# EAGLE board SeeedMega_bare (EAGLE 6.1)
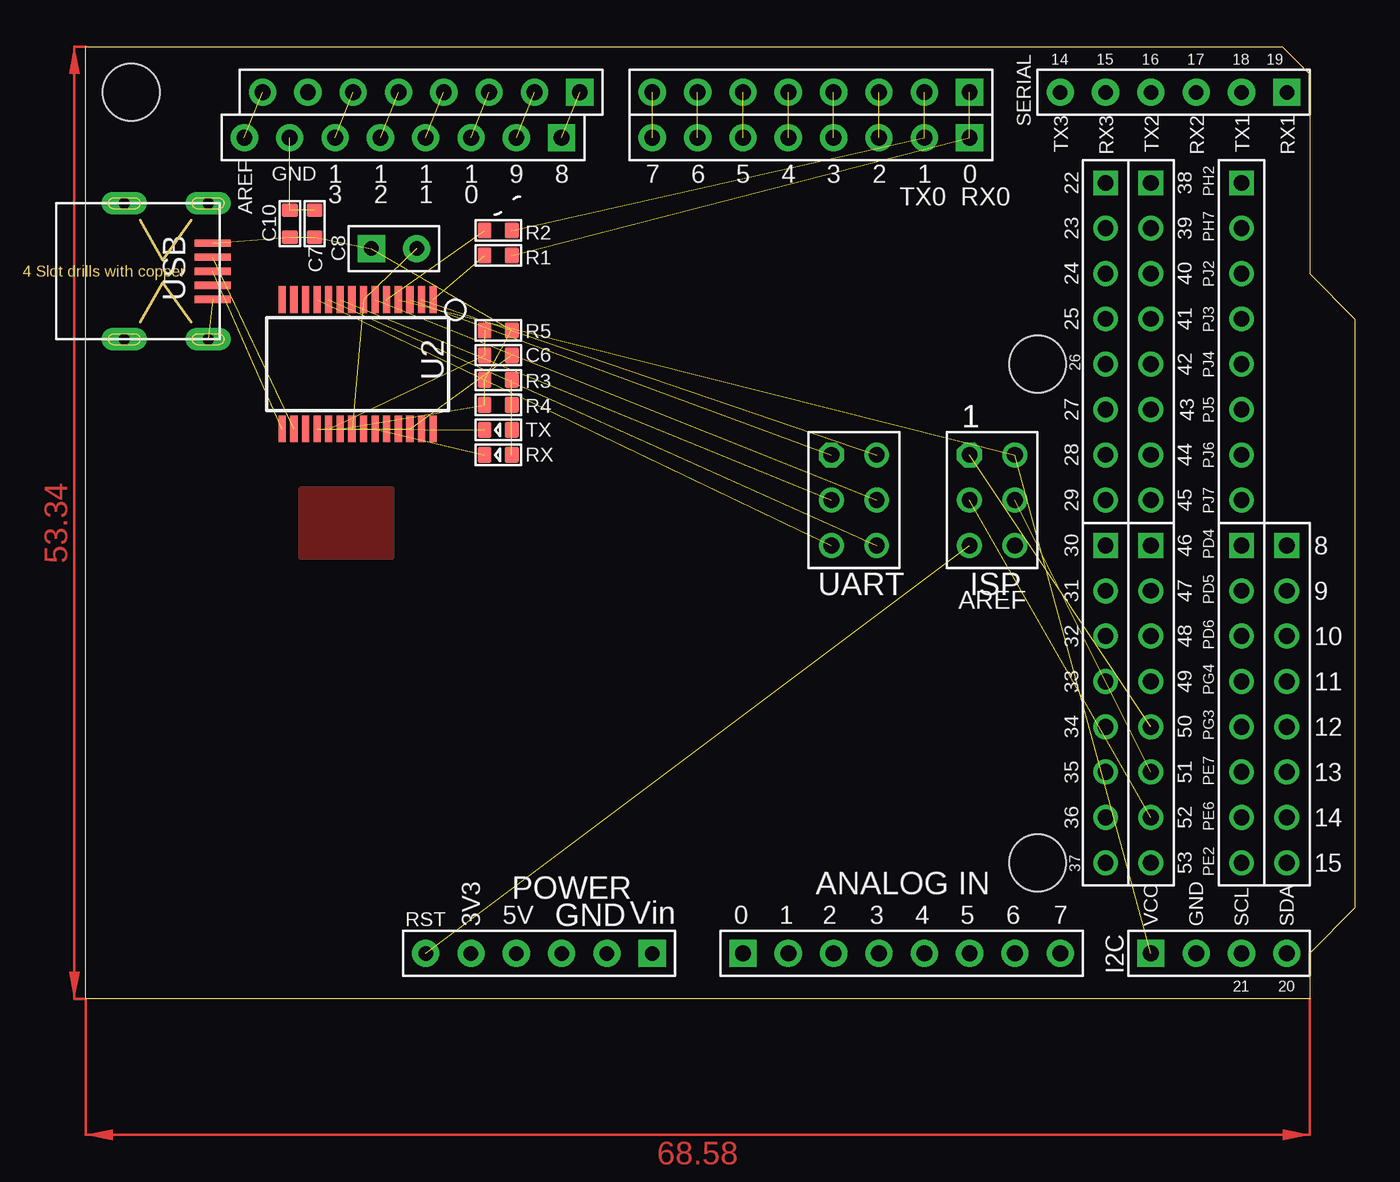
[diagram p0: board, top side]
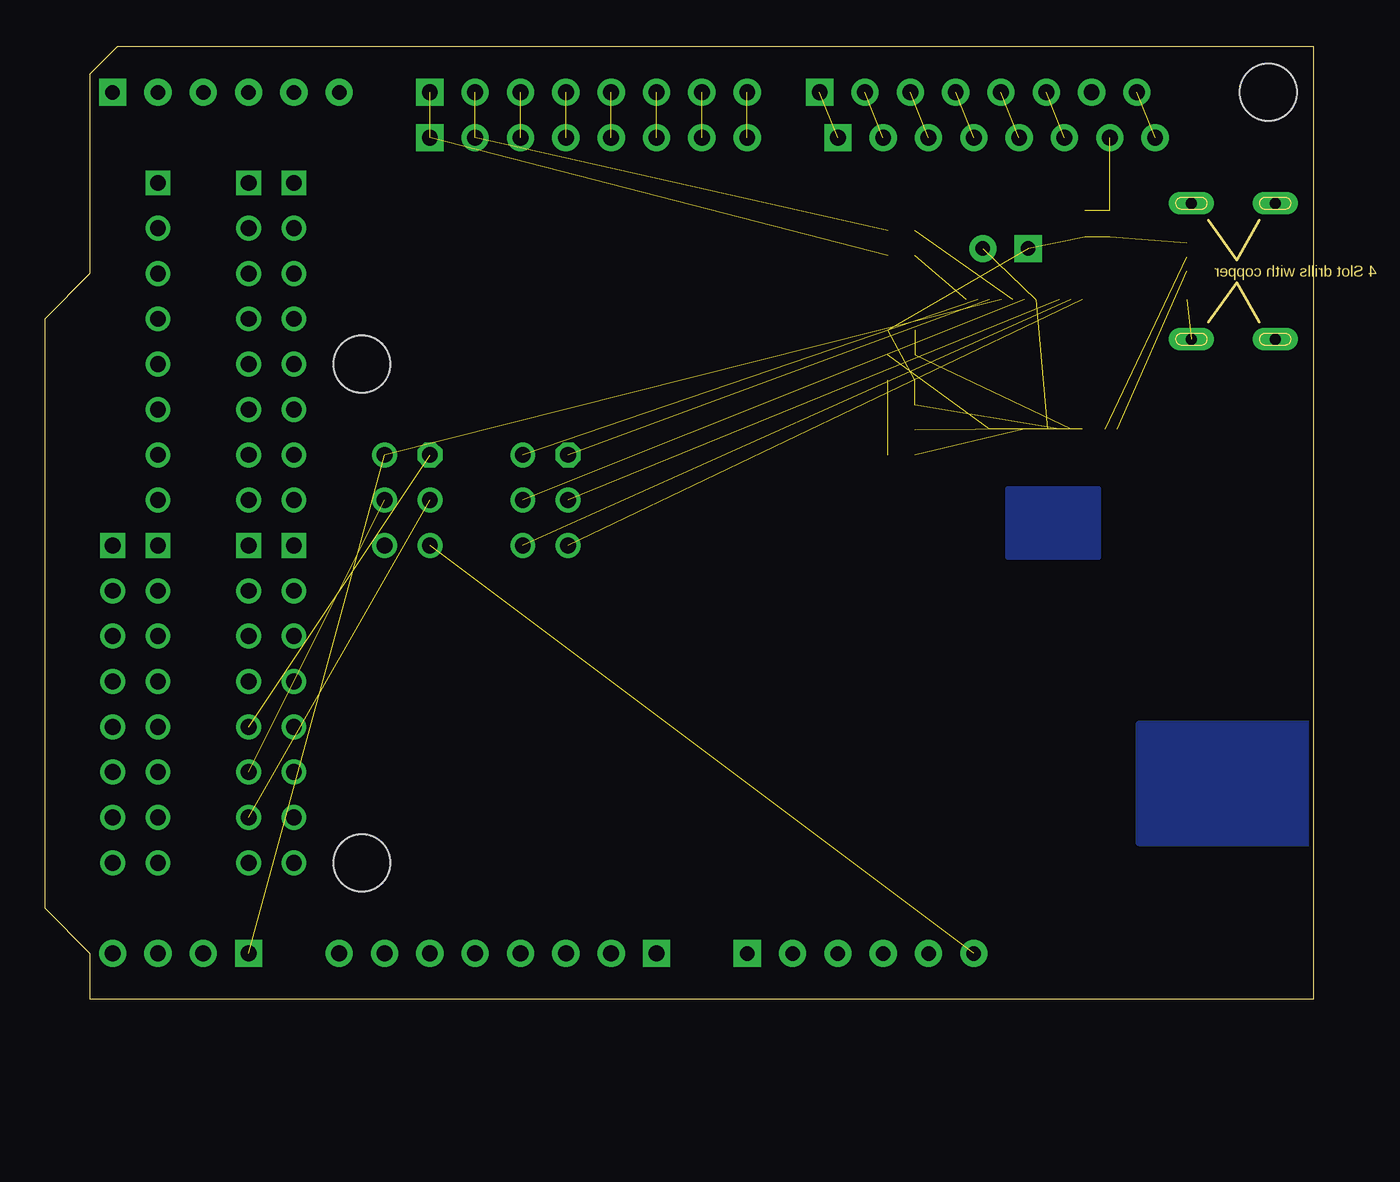
[diagram p1: board, bottom side, seen from below]

Size 71.12 x 53.34 mm. Coordinates in mm from the lower left corner, seen from the top.
Outline: 68.58,40.64 71.12,38.1 71.12,5.08 68.58,2.54 68.58,0 0,0 0,53.34 67.06,53.34 68.58,51.82 68.58,40.64
Copper layers (1*16): Top 0.035mm / dielectric 1.5mm / Bottom 0.035mm
Design rules: minimum track width 8mil, minimum drill 12mil, track to track 6mil, track to pad 6mil, pad to pad 6mil, via to via 8mil, smd to smd 0mil, copper to edge 10mil, drill to drill 10mil, minimum pad ring 10mil, minimum via ring 6mil, stop-mask expansion 2mil, vias tented up to drill 25mil, thermal gap 10mil
Holes 3.2 mm at 2.54,50.8 53.34,7.62 53.34,35.56
tRestrict: area 22.5,30.6 to 23.4,32; area 4.6,49.3 to 8.4,52.3; area 17.5,31.5 to 18.2,32.3; area 15.2,38.9 to 15.9,39.9

## Footprints (pad centres in the part's own frame; a part is rotated, then mirrored left to right if it is on the bottom)
CK_1X8 = drill 0.889 pad 1.524 square: 1 0,8.89 | drill 0.889 pad 1.524: 2 0,6.35; 3 0,3.81; 4 0,1.27; 5 0,-1.27; 6 0,-3.81; 7 0,-6.35; 8 0,-8.89
0603_S = smd 0.762 x 0.889: 1 -0.762,0; 2 0.762,0
PWR_1X2 = drill 0.813 pad 1.524 square: + 1.27,0 | drill 0.813 pad 1.524: - -1.27,0
CK_1X8_THIN = drill 0.889 pad 1.397 square: 1 0,8.89 | drill 0.889 pad 1.397: 2 0,6.35; 3 0,3.81; 4 0,1.27; 5 0,-1.27; 6 0,-3.81; 7 0,-6.35; 8 0,-8.89
CK_1X4 = drill 0.889 pad 1.524 square: 1 0,3.81 | drill 0.889 pad 1.524: 2 0,1.27; 3 0,-1.27; 4 0,-3.81
CK_2X3_THIN = drill 0.889 pad 1.397 octagon: 1 -1.27,2.54 | drill 0.889 pad 1.397: 2 -1.27,0; 3 -1.27,-2.54; 4 1.27,-2.54; 5 1.27,0; 6 1.27,2.54
CK_1X6@1 = drill 0.813 pad 1.524 square: 1 0,6.35 | drill 0.813 pad 1.524: 2 0,3.81; 3 0,1.27; 4 0,-1.27; 5 0,-3.81; 6 0,-6.35
LED0603_S = smd 0.762 x 0.889: 1 -0.762,0; 2 0.762,0
SSOP28 = smd 0.4 x 1.5: 1 -4.225,-3.625; 2 -3.575,-3.625; 3 -2.925,-3.625; 4 -2.275,-3.625; 5 -1.625,-3.625; 6 -0.975,-3.625; 7 -0.325,-3.625; 8 0.325,-3.625; 9 0.975,-3.625; 10 1.625,-3.625; 11 2.275,-3.625; 12 2.925,-3.625; 13 3.575,-3.625; 14 4.225,-3.625; 15 4.225,3.625; 16 3.575,3.625; 17 2.925,3.625; 18 2.275,3.625; 19 1.625,3.625; 20 0.975,3.625; 21 0.325,3.625; 22 -0.325,3.625; 23 -0.975,3.625; 24 -1.625,3.625; 25 -2.275,3.625; 26 -2.925,3.625; 27 -3.575,3.625; 28 -4.225,3.625
MINI_STRONG = smd 2.032 x 0.406: 1 0.381,-1.575; 2 0.381,-0.787; 3 0.381,0; 4 0.381,0.787; 5 0.381,1.575 | drill 0.635 pad 1.27 long: GND@1 0.635,3.81; GND@2 5.334,3.81; GND@3 5.334,-3.81; GND@4 0.635,-3.81

## Placement (x,y rotation side)
0~1  CK_1X8DD  [CK_1X8]  40.64,48.26 270 top
0~2  CK_1X8DD  [CK_1X8]  45.72,2.54 90 top
0~7  CK_1X8DD  [CK_1X8]  40.64,50.8 270 top
8~1  CK_1X8DD  [CK_1X8]  17.78,48.26 270 top
8~13  CK_1X8DD  [CK_1X8]  18.8,50.8 270 top
C6  100n  [0603_S]  23.11,36.07 180 top
C7  100n  [0603_S]  12.83,43.43 90 top
C8  PWR2P_2.54_180  [PWR_1X2]  17.27,42.04 180 top
C10  10n  [0603_S]  11.43,43.43 270 top
D22~  CK_1X8_THIN  [CK_1X8_THIN]  57.15,36.83 0 top
D30~  CK_1X8_THIN  [CK_1X8_THIN]  57.15,16.51 0 top
D38~  CK_1X8_THIN  [CK_1X8_THIN]  59.69,36.83 0 top
D46~  CK_1X8_THIN  [CK_1X8_THIN]  59.69,16.51 0 top
I2C  CK_1X4  [CK_1X4]  63.5,2.54 90 top
ISP  CK_2X3  [CK_2X3_THIN]  50.8,27.94 0 top
J8  CK_1X8_THIN  [CK_1X8_THIN]  64.77,16.51 0 top
J9  CK_1X8_THIN  [CK_1X8_THIN]  67.31,16.51 0 top
J10  CK_1X8_THIN  [CK_1X8_THIN]  64.77,36.83 0 top
J11  [CK_1X6@1]  25.4,2.54 270 top
R1  1k  [0603_S]  23.11,41.66 0 top
R2  1k  [0603_S]  23.11,43.05 0 top
R3  1k  [0603_S]  23.11,34.67 180 top
R4  1k  [0603_S]  23.11,33.27 180 top
R5  10k  [0603_S]  23.11,37.47 180 top
RX  LED0603  [LED0603_S]  23.11,30.48 180 top
SERIAL  [CK_1X6@1]  60.96,50.8 270 top
TX  LED0603  [LED0603_S]  23.11,31.88 180 top
U2  FT232RL  [SSOP28]  15.24,35.56 180 top
UART  CK_2X3  [CK_2X3_THIN]  43.05,27.94 0 top
USB  [MINI_STRONG]  7.49,40.77 180 top

## Library data of the parts
0~1 0~2 0~7 8~1 8~13 C8 D22~ D30~ D38~ D46~ I2C ISP J8-J11 SERIAL UART = CONNECTER
C6 C7 C10 R1-R5 RX TX = CPT_SMD
U2 = ICs_v54
USB = Connector

## Nets
ADC8: J9.1
ADC9: J9.2
ADC10: J9.3
ADC11: J9.4
ADC12: J9.5
ADC13: J9.6
ADC14: J9.7
ADC15: J9.8
AREF: 8~1.8 8~13.8
CTS: U2.11 UART.3
D+: U2.15 USB.3
D-: U2.16 USB.2
DCD: U2.10 UART.4
DSR: U2.9 UART.2
DTR: U2.2 UART.6
FT_RST: C6.2 R5.2 U2.19
FT_RX: R2.1 U2.5
FT_TX: R1.1 U2.1
GND: 8~1.7 8~13.7 C6.1 C7.2 C8.- C10.1 I2C.2 ISP.4 J11.2 J11.3 U2.7 U2.18 U2.21 U2.25 U2.26 USB.5 USB.GND@1 USB.GND@2 USB.GND@3 USB.GND@4
LED_RX: RX.2 U2.23
LED_TX: TX.2 U2.22
N$6: U2.17
N$31: R3.1 RX.1
N$32: R4.1 TX.1
PA0/D22: D22~.1
PA1/D23: D22~.2
PA2/D24: D22~.3
PA3/D25: D22~.4
PA4/D26: D22~.5
PA5/D27: D22~.6
PA6/D28: D22~.7
PA7/D29: D22~.8
PB0/D53: D46~.8
PB1/SCK/D52: D46~.7 ISP.2
PB2/MOSI/D51: D46~.6 ISP.5
PB3/MISO/D50: D46~.5 ISP.1
PB4/D10: 8~1.3 8~13.3
PB5/D11: 8~1.4 8~13.4
PB6/D12: 8~1.5 8~13.5
PB7/D13: 8~1.6 8~13.6
PC0/D37: D30~.8
PC1/D36: D30~.7
PC2/D35: D30~.6
PC3/D34: D30~.5
PC4/D33: D30~.4
PC5/D32: D30~.3
PC6/D31: D30~.2
PC7/D30: D30~.1
PD0/SCL: I2C.3
PD1/SDA: I2C.4
PD2/RX1: SERIAL.1
PD3/TX1: SERIAL.2
PD4: J8.1
PD5: J8.2
PD6: J8.3
PD7/D38: D38~.1
PE0/RX0/D0: 0~1.1 0~7.1 R1.2
PE1/TX0/D1: 0~1.2 0~7.2 R2.2
PE2: J8.8
PE3/D5: 0~1.6 0~7.6
PE4/D2: 0~1.3 0~7.3
PE5/D3: 0~1.4 0~7.4
PE6: J8.7
PE7: J8.6
PF0/D54: 0~2.1
PF1/D55: 0~2.2
PF2/D56: 0~2.3
PF3/D57: 0~2.4
PF4/D58: 0~2.5
PF5/D59: 0~2.6
PF6/D60: 0~2.7
PF7/D61: 0~2.8
PG0/D41: D38~.4
PG1/D40: D38~.3
PG2/D39: D38~.2
PG3: J8.5
PG4: J8.4
PG5/D4: 0~1.5 0~7.5
PH0/RXD2: SERIAL.3
PH1/TXD2: SERIAL.4
PH2: J10.1
PH3/D6: 0~1.7 0~7.7
PH4/D7: 0~1.8 0~7.8
PH5/D8: 8~1.1 8~13.1
PH6/D9: 8~1.2 8~13.2
PH7: J10.2
PJ0/RXD3: SERIAL.5
PJ1/TXD3: SERIAL.6
PJ2: J10.3
PJ3: J10.4
PJ4: J10.5
PJ5: J10.6
PJ6: J10.7
PJ7: J10.8
PL0/D49: D46~.4
PL1/D48: D46~.3
PL2/D47: D46~.2
PL3/D46: D46~.1
PL4/D45: D38~.8
PL5/D44: D38~.7
PL6/D43: D38~.6
PL7/D42: D38~.5
RESET_1280: ISP.3 J11.6
RI: U2.6 UART.5
RTS: U2.3 UART.1
VCC: I2C.1 ISP.6 U2.4
VDD3V3: J11.5
VDD5_USB: C7.1 C8.+ C10.2 R3.2 R4.2 R5.1 U2.20 USB.1
VDD5V: J11.4
VDD_EXT: J11.1

## Tracks (layer width: path | path; a pad name or v marks a point on that pad's centre or on a via)
AREF  (1 unrouted)
CTS  (1 unrouted)
D+  (1 unrouted)
D-  (1 unrouted)
DCD  (1 unrouted)
DSR  (1 unrouted)
DTR  (1 unrouted)
FT_RST  (2 unrouted)
FT_RX  (1 unrouted)
FT_TX  (1 unrouted)
GND  (9 unrouted)
LED_RX  (1 unrouted)
LED_TX  (1 unrouted)
N$31  (1 unrouted)
N$32  (1 unrouted)
PB1/SCK/D52  (1 unrouted)
PB2/MOSI/D51  (1 unrouted)
PB3/MISO/D50  (1 unrouted)
PB4/D10  (1 unrouted)
PB5/D11  (1 unrouted)
PB6/D12  (1 unrouted)
PB7/D13  (1 unrouted)
PE0/RX0/D0  (2 unrouted)
PE1/TX0/D1  (2 unrouted)
PE3/D5  (1 unrouted)
PE4/D2  (1 unrouted)
PE5/D3  (1 unrouted)
PG5/D4  (1 unrouted)
PH3/D6  (1 unrouted)
PH4/D7  (1 unrouted)
PH5/D8  (1 unrouted)
PH6/D9  (1 unrouted)
RESET_1280  (1 unrouted)
RI  (1 unrouted)
RTS  (1 unrouted)
VCC  (2 unrouted)
VDD3V3
  pour Top (isolate 0.406): 12.06,28.57 17.14,28.57 17.14,24.77 12.06,24.77
  pour Bottom: 12.06,28.57 17.14,28.57 17.14,24.77 12.06,24.77
VDD5
  pour Bottom: 9.78,15.37 0,15.37 0,8.76 9.78,8.76
VDD5_USB  (7 unrouted)
(copper drawn outside any net)
  shapes: Top area x2

## Text on the board
tPlace: 14 | 15 | 16 | 17 | 18 | 19 | TX3 | RX3 | TX2 | RX2 | TX1 | RX1 | AREF | GND | 1 | 1 | 1 | 1 | 9 | 8 | 7 | 6 | 5 | 4 | 3 | 2 | 1 | 0 | 3 | 2 | 1 | 0 | 22 | 38 | PH2 | TX0 | RX0 | 23 | 39 | PH7 | 24 | 40 | PJ2 | 25 | 41 | PJ3 | 26 | 42 | PJ4 | 1 | 27 | 43 | PJ5 | 28 | 44 | PJ6 | 29 | 45 | PJ7 | 30 | 46 | PD4 | 8 | AREF | 31 | 47 | PD5 | 9 | 32 | 48 | PD6 | 10 | 33 | 49 | PG4 | 11 | 34 | 50 | 12 | PG3 | 35 | 51 | PE7 | 13 | 36 | 52 | 14 | PE6 | 37 | 53 | PE2 | 15 | POWER | ANALOG IN | RST | 3V3 | 5V | GND | Vin | 0 | 1 | 2 | 3 | 4 | 5 | 6 | 7 | VCC | GND | SCL | SDA | 21 | 20
Reference: SUPER